# EAGLE board SOT-23 (EAGLE 6.4)
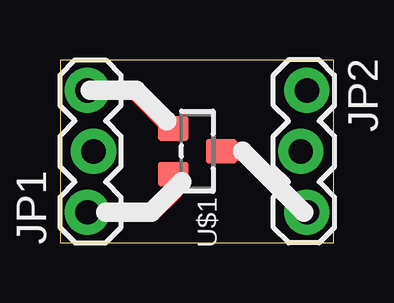
[diagram p0: board, top side]
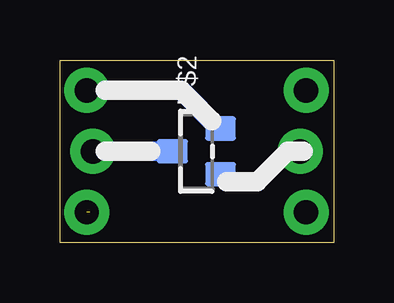
[diagram p1: board, bottom side, seen from below]

Size 11.4 x 7.62 mm. Coordinates in mm from the lower left corner, seen from the top.
Outline: 0,0 11.4,0 11.4,7.62 0,7.62 0,0
Copper layers (1*16): Top 0.035mm / dielectric 1.5mm / Bottom 0.035mm
Design rules "default": minimum track width 10mil, minimum drill 24mil, track to track 8mil, track to pad 8mil, pad to pad 8mil, via to via 8mil, smd to smd 8mil, copper to edge 40mil, drill to drill 8mil, minimum pad ring 10mil, minimum via ring 8mil, stop-mask expansion 4mil, vias tented up to drill 0mil, thermal gap 10mil

## Footprints (pad centres in the part's own frame; a part is rotated, then mirrored left to right if it is on the bottom)
1X03_LOCK = drill 1.016 pad 1.88: 1 0,0.127; 2 2.54,-0.127; 3 5.08,0.127
SOT-23 = smd 1 x 1.27: 1 -0.95,-1; 2 0.95,-1; 3 0,1

## Placement (x,y rotation side)
JP1  [1X03_LOCK]  1.27,1.27 90 top
JP2  [1X03_LOCK]  10.16,6.35 270 top
U$1  DMP1045U  [SOT-23]  5.71,3.81 270 top
U$2  DMP1045U  [SOT-23]  5.71,3.81 90 bottom

## Library data of the parts
JP1 JP2 = SparkFun
U$1 U$2 = zak

## Nets
D: JP2.3 U$1.3
D2: JP2.2 U$2.3
G: JP1.3 U$1.1
G2: JP1.2 U$2.1
S: JP1.1 U$1.2
S2: JP2.1 U$2.2

## Tracks (layer width: path | path; a pad name or v marks a point on that pad's centre or on a via)
D  (1 unrouted)
  Top 0.813: U$1.3 7.62,3.81 10.16,1.27
D2
  Bottom 0.813: U$2.3 JP2.2
G
  Top 0.813: JP1.3 3.12,6.35 U$1.1
G2
  Bottom 0.406: 4.39,2.54 U$2.1
  Bottom 0.813: JP1.2 1.91,3.81 3.17,2.54 4.39,2.54
S
  Top 0.406: U$1.2 4.71,2.17
  Top 0.813: 4.71,2.17 3.81,1.27 JP1.1
S2
  Bottom 0.406: U$2.2 4.76,4.76
  Bottom 0.813: 4.76,4.76 6.35,6.35 JP2.1